# Altium PCB usomiq-bone-cape.PcbDoc (part 1 of 2)
Units mm, origin at the board's own origin, x right, y up, seen from the top; angles counter-clockwise.
Board outline 86.36 x 54.61 mm, 2 copper layers (Top Layer, Bottom Layer); 65 components, 133 nets, 450 pads, 169 vias.
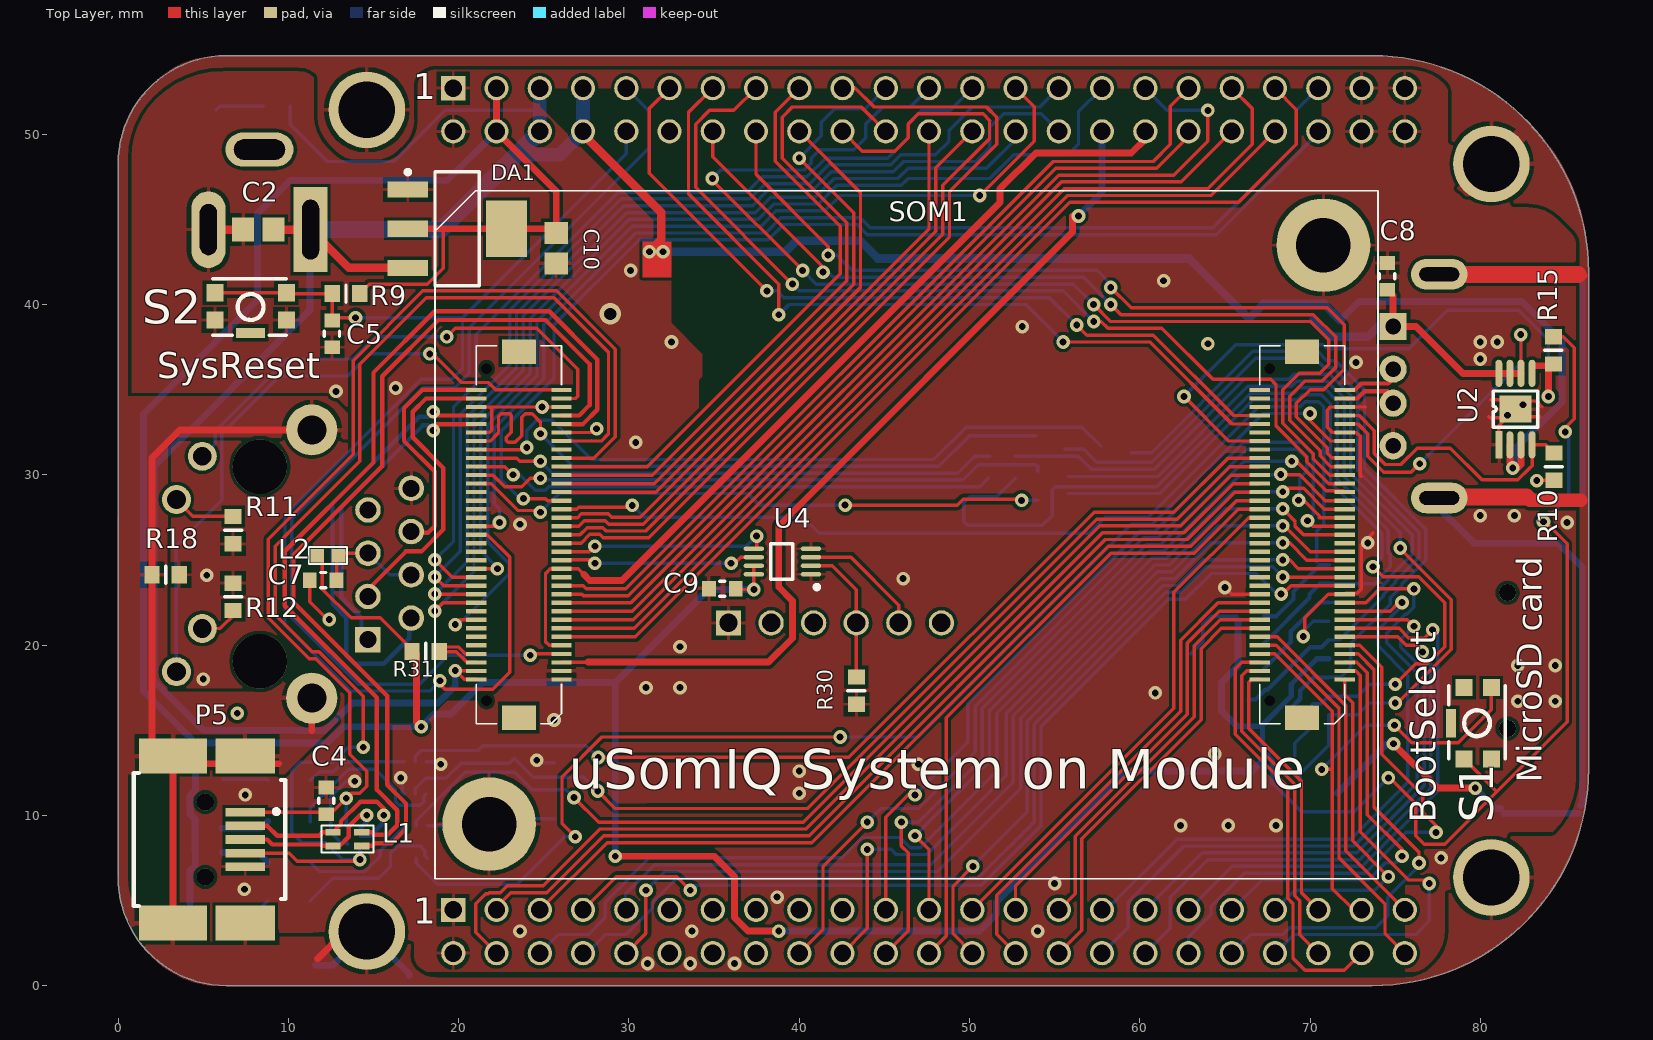
[diagram p0: Top Layer view]
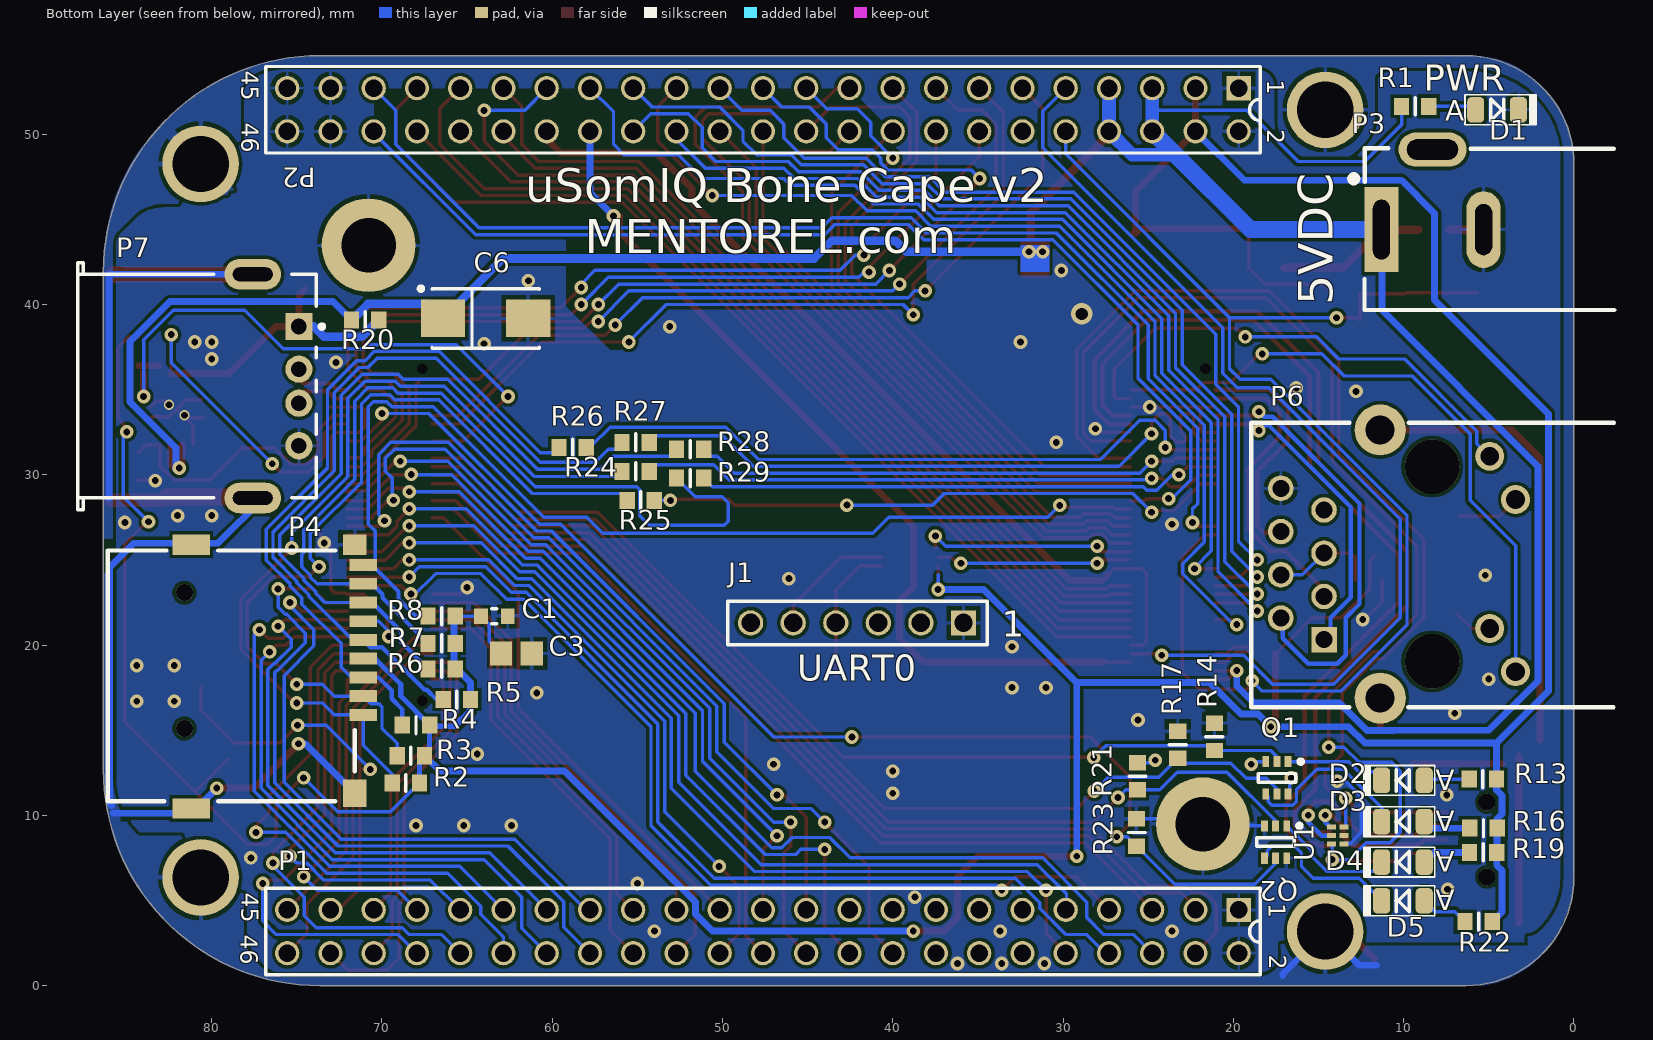
[diagram p1: Bottom Layer view, seen from below]

## Layer stack, top to bottom
Top Layer: signal copper 0.0356
Dielectric: dielectric 0.32, FR-4, Dk 4.8
Bottom Layer: signal copper 0.0356

## Board outline
0,6.35 0,48.26 cw(c6.35,48.26) 6.35,54.61 73.66,54.61 cw(c73.66,41.91) 86.36,41.91 86.36,12.7 cw(c73.66,12.7) 73.66,0 6.35,0 cw(c6.35,6.35)

## Design rules (kind name [scope] priority, off if disabled: settings)
AssemblyTestPointUsage [All] p1 off:
AssemblyTestPointUsage AssemblyTestPointUsage_1 [All] p2 off:
AssemblyTestpoint [All] p1 off: testpointundercomponent=TRUE minsize=1.016 maxsize=2.54 preferedsize=1.524 minholesize=0 maxholesize=1.016 preferedholesize=0.813 testpointgrid=0.025 usegrid=TRUE gridtolerance=0 allowsidetop=TRUE allowsidebottom=TRUE
AssemblyTestpoint AssemblyTestpoint_1 [All] p2 off: testpointundercomponent=TRUE minsize=1.016 maxsize=2.54 preferedsize=1.524 minholesize=0 maxholesize=1.016 preferedholesize=0.813 testpointgrid=0.025 usegrid=TRUE gridtolerance=0 allowsidetop=TRUE allowsidebottom=TRUE
Clearance [All] p1: gap=0.2
ComponentClearance [All] p1 off: gap=0.254 collisioncheckmode=3 verticalgap=0.254 showdistances=FALSE
ComponentClearance ComponentClearance_1 [All] p2 off: gap=0.254 collisioncheckmode=3 verticalgap=0.254 showdistances=FALSE
DiffPairsRouting [InNetClass('DIFF')] p1: maxlimit=0.254 minlimit=0.254 mostfreqgap=0.254 maxuncoupledlength=12.7
FabricationTestPointUsage [All] p1 off: valid=0 allowmultiple=FALSE
FabricationTestPointUsage FabricationTestPointUsage_1 [All] p2 off: valid=0 allowmultiple=FALSE
FabricationTestpoint [All] p1 off: side=3 testpointundercomponent=TRUE minsize=1.016 maxsize=2.54 preferedsize=1.524 minholesize=0 maxholesize=1.016 preferedholesize=0.813 testpointgrid=0.025 allowsidetop=TRUE allowsidebottom=TRUE usegrid=TRUE gridtolerance=0
FabricationTestpoint FabricationTestpoint_1 [All] p2 off: side=3 testpointundercomponent=TRUE minsize=1.016 maxsize=2.54 preferedsize=1.524 minholesize=0 maxholesize=1.016 preferedholesize=0.813 testpointgrid=0.025 allowsidetop=TRUE allowsidebottom=TRUE usegrid=TRUE gridtolerance=0
FanoutControl Fanout_LCC [IsLCC] p1: bgadir=Out bgaviamode=Centered fanoutstyle=Auto fanoutdirection=Alternating viagrid=0.025 // Fanout_LCC (Default Rule)
FanoutControl Fanout_BGA [IsBGA] p2: bgadir=Out bgaviamode=Centered fanoutstyle=Auto fanoutdirection=Alternating viagrid=0.025 // Fanout_BGA (Default Rule)
FanoutControl Fanout_Default [All] p4: bgadir=Out bgaviamode=Centered fanoutstyle=Auto fanoutdirection=Alternating viagrid=0.025 // Fanout_Default (Default Rule)
FanoutControl Fanout_Small [(CompPinCount < 5)] p5: bgadir=Out bgaviamode=Centered fanoutstyle=Auto fanoutdirection=OutThenIn viagrid=0.025 // Fanout_Small (Default Rule)
FanoutControl Fanout_BGA_1 [IsBGA] p6: bgadir=Out bgaviamode=Centered fanoutstyle=Auto fanoutdirection=Alternating viagrid=0.025 // Fanout_BGA (Default Rule)
FanoutControl Fanout_LCC_1 [IsLCC] p7: bgadir=Out bgaviamode=Centered fanoutstyle=Auto fanoutdirection=Alternating viagrid=0.025 // Fanout_LCC (Default Rule)
FanoutControl Fanout_SOIC_1 [IsSOIC] p8: bgadir=Out bgaviamode=Centered fanoutstyle=Auto fanoutdirection=Alternating viagrid=0.025 // Fanout_SOIC (Default Rule)
FanoutControl Fanout_Small_1 [(CompPinCount < 5)] p9: bgadir=Out bgaviamode=Centered fanoutstyle=Auto fanoutdirection=OutThenIn viagrid=0.025 // Fanout_Small (Default Rule)
FanoutControl Fanout_Default_1 [All] p10: bgadir=Out bgaviamode=Centered fanoutstyle=Auto fanoutdirection=Alternating viagrid=0.025 // Fanout_Default (Default Rule)
Height [All] p1 off: minheight=0 maxheight=25.4 prefheight=12.7
Height Height_1 [All] p2 off: minheight=0 maxheight=25.4 prefheight=12.7
HoleSize [All] p1 off: absolutevalues=TRUE maxlimit=2.54 minlimit=0.025 maxpercent=80.000 minpercent=20.000
HoleSize HoleSize_1 [All] p2 off: absolutevalues=TRUE maxlimit=2.54 minlimit=0.025 maxpercent=80.000 minpercent=20.000
HoleToHoleClearance [All] p1 off: gap=0.254 allowstackedmicrovias=TRUE
HoleToHoleClearance HoleToHoleClearance_1 [All] p2 off: gap=0.254 allowstackedmicrovias=TRUE
LayerPairs [All] p1 off: enforce=TRUE
LayerPairs LayerPairs_1 [All] p2 off: enforce=TRUE
MinimumSolderMaskSliver [All] p1 off: minsoldermaskwidth=0.254
MinimumSolderMaskSliver MinimumSolderMaskSliver_1 [All] p2 off: minsoldermaskwidth=0.254
NetAntennae [All] p1 off: netantennaetolerance=0
NetAntennae NetAntennae_1 [All] p2 off: netantennaetolerance=0
PasteMaskExpansion PasteMaskExpansion_1 [All] p2: expansion=0
PlaneClearance [All] p1 off: clearance=0.508
PlaneConnect [All] p1: planeconnectstyle=Relief reliefexpansion=0.2 reliefentries=4 reliefconductorwidth=0.2 reliefairgap=0.2
PolygonConnect PolygonConnect_EARTH [All vs InNet(EARTH)] p1: connectstyle=Relief reliefconductorwidth=0.254 reliefentries=4 polygonreliefangle="90 Angle" airgapwidth=0.254
PolygonConnect PolygonConnect_Via [IsVia] p2: connectstyle=Direct reliefconductorwidth=0.254 reliefentries=4 polygonreliefangle="90 Angle" airgapwidth=0.254
PolygonConnect [All] p3: connectstyle=Relief reliefconductorwidth=0.2 reliefentries=4 polygonreliefangle="90 Angle" airgapwidth=0.254
RoutingPriority RoutingPriority_1 [All] p2: routingpriority=0
RoutingTopology RoutingTopology_1 [All] p2: topology=Shortest
RoutingVias [All] p1: holewidth=0.4 width=0.8 viastyle="Through Hole" minholewidth=0.4 minwidth=0.8 maxholewidth=0.4 maxwidth=0.8
SilkToSilkClearance [All] p1 off: silktosilkclearance=0.254
SilkToSilkClearance SilkToSilkClearance_1 [All] p2 off: silktosilkclearance=0.254
SilkscreenOverComponentPads [All] p1 off: minsilkscreentomaskgap=0.254
SilkscreenOverComponentPads SilkscreenOverComponentPads_1 [All] p2 off: minsilkscreentomaskgap=0.254
SolderMaskExpansion [All] p1: expansion=0.102
SolderMaskExpansion SolderMaskExpansion_1 [All] p2: expansion=0.102
UnRoutedNet UnRoutedNet_1 [All] p2:
Width Width_diff [InNetClass('DIFF')] p1: maxlimit=0.254 minlimit=0.254 preferedwidth=0.254
Width [All] p2: maxlimit=1 minlimit=0.2 preferedwidth=0.2
8 further rules are at their usual default settings.

## Classes and differential pairs
component class bone_capes: P1 P2
component class usomiq: SOM1
differential pair ETH_RX: +ETH_RX_P -ETH_RX_N
differential pair ETH_TX: +ETH_TX_P -ETH_TX_N
differential pair USB0_D: +USB0_D_P -USB0_D_N
differential pair USB0: +USB0_P -USB0_N
differential pair USB1: +USB1_P -USB1_N

## Components (designator, comment, footprint, x,y, rotation, side; value= is the part's Value field where it differs from the comment)
C1 "C0603" CC1608-0603 63.4,21.7 r180 bottom
C2 "C0805" CC2012-0805 8.23,44.399 r0 top
C3 "C0805" CC2012-0805 62.1,19.5 r0 bottom
C4 "C0603" CC1608-0603 12.219,10.855 r90 top locked
C5 "C0603" CC1608-0603 12.573,38.278 r270 top
C6 "Cap_C" Cap_C 63.914,39.182 r180 bottom locked
C7 "C0603" CC1608-0603 12.044,23.805 r180 top locked
C8 "C0603" CC1608-0603 74.539,41.657 r270 top locked
C9 "C0603" CC1608-0603 35.484,23.317 r0 top
C10 "C0805" CC2012-0805 25.73,43.307 r90 top
D1 "LED0805" LED0805 5.766,51.435 r180 bottom
D2 "LED0805" LED0805 8.789,12.057 r0 bottom locked
D3 "LED0805" LED0805 8.789,9.632 r0 bottom locked
D4 "LED0805" LED0805 8.789,7.257 r0 bottom locked
D5 "LED0805" LED0805 8.789,4.982 r0 bottom locked
DA1 "LM1117" SOT230P700X160-4N 19.914,44.45 r0 top
J1 "HEADER 6" DIP6 35.85,21.3 r270 bottom locked
L1 "DLW21H" DLW21H 13.469,8.605 r0 top locked
L2 "BLM18A-FB" CHIP0603 11.694,25.255 r0 top locked
P1 "HDR_46_F_2_0.1_0.1" DIP46 19.685,4.445 r270 bottom locked
P2 "HDR_46_F_2_0.1_0.1" DIP46 19.685,52.705 r270 bottom locked
P3 "PJ-002A" PJ-002A 11.303,44.399 r90 bottom
P4 "" TFC08WP01F-A-R1K-H 71.1,15.9 r270 bottom locked
P5 "MiniUSB-B" "MINI-USB-B5 SMT" 1.219,13.081 r0 top
P6 "CONN_RJ45_MAG_WE_0" TRJ0011ABNL 14.675,20.315 r90 bottom locked
P7 "CONN_54819-0578_2" USB2.5-2H4C 87.869,35.205 r0 bottom locked
Q1 "RN1907" SOT363-6L 17.444,12.205 r270 bottom locked
Q2 "RN1907" SOT363-6L 17.519,8.43 r270 bottom locked
R1 "R0603" RESC1608X55N 9.322,51.638 r0 bottom
R2 "R0603" RESC1608X55N 68.6,11.9 r180 bottom
R3 "R0603" RESC1608X55N 68.3,13.5 r180 bottom
R4 "R0603" RESC1608X55N 68,15.3 r180 bottom
R5 "R0603" RESC1608X55N 65.6,16.8 r180 bottom
R6 "R0603" RESC1608X55N 66.5,18.6 r180 bottom
R7 "R0603" RESC1608X55N 66.5,20.1 r180 bottom
R8 "R0603" RESC1608X55N 66.5,21.7 r180 bottom
R9 "R0603" RESC1608X55N 13.386,40.64 r0 top
R10 "R0603" RESC1608X55N 84.314,30.482 r90 top locked
R11 "R0603" RESC1608X55N 6.756,26.746 r90 top
R12 "R0603" RESC1608X55N 6.756,22.835 r270 top
R13 "R0603" RESC1608X55N 5.344,12.13 r180 bottom locked
R14 "R0603" RESC1608X55N 21.114,14.607 r270 bottom locked
R15 "R0603" RESC1608X55N 84.289,37.307 r90 top locked
R16 "R0603" RESC1608X55N 5.309,9.246 r180 bottom
R17 "R0603" RESC1608X55N 23.266,14.148 r270 bottom
R18 "R0603" RESC1608X55N 2.794,24.13 r180 top locked
R19 "R0603" RESC1608X55N 5.334,7.823 r180 bottom
R20 "R0603" RESC1608X55N 70.989,39.082 r0 bottom
R21 "R0603" RESC1608X55N 25.629,12.294 r270 bottom
R22 "R0603" RESC1608X55N 5.594,3.755 r180 bottom
R23 "R0603" RESC1608X55N 25.679,8.992 r270 bottom
R24 "R0603" RESC1608X55N 55.1,30.2 r180 bottom
R25 "R0603" RESC1608X55N 54.8,28.5 r180 bottom
R26 "R0603" RESC1608X55N 58.8,31.6 r180 bottom
R27 "R0603" RESC1608X55N 55.1,31.9 r180 bottom
R28 "R0603" RESC1608X55N 51.9,31.5 r180 bottom
R29 "R0603" RESC1608X55N 51.9,29.8 r180 bottom
R30 "R0603" RESC1608X55N 43.358,17.323 r270 top
R31 "R0603" RESC1608X55N 18.059,19.609 r0 top
S1 "SW_KT11P2JM_2" KMR231GLFS 79.045,13.31 r90 top
S2 "SW_KT11P2JM_2" KMR231GLFS 9.881,39.091 r180 top
SOM1 "som-am335x" am3359_module-sockets 21.789,9.482 r0 top locked
U1 "TPD4S012" s-puson-n6 14.239,9.307 r180 bottom locked
U2 "TPS2051B" R-PDSO-G8 81.089,31.757 r90 top
U4 "IC_SN74LVC2G241_1" SOP127P600-8N 39.014,24.907 r180 top locked

## Footprints (in the part's own frame and the unit in brackets; to place one, negate y for a bottom-side part, rotate by r counter-clockwise, add the part's x,y. Pads: shape width x height; smd on the part's side, far side on the other; paste and mask are expansions set on the pad)
am3359_module-sockets [mm]
  rect 1.2x0.25 smd paste+0 mask+0.02: A1(4.25,8.5) A2(-0.75,8.5) A3(4.25,9) A4(-0.75,9) A5(4.25,9.5) A6(-0.75,9.5) A7(4.25,10) A8(-0.75,10) A9(4.25,10.5) A10(-0.75,10.5) A11(4.25,11) A12(-0.75,11) A13(4.25,11.5) A14(-0.75,11.5) A15(4.25,12) A16(-0.75,12) A17(4.25,12.5) A18(-0.75,12.5) A19(4.25,13) A20(-0.75,13) A21(4.25,13.5) A22(-0.75,13.5) A23(4.25,14) A24(-0.75,14) A25(4.25,14.5) A26(-0.75,14.5) A27(4.25,15) A28(-0.75,15) A29(4.25,15.5) A30(-0.75,15.5) A31(4.25,16) A32(-0.75,16) A33(4.25,16.5) A34(-0.75,16.5) A35(4.25,17) A36(-0.75,17) A37(4.25,17.5) A38(-0.75,17.5) A39(4.25,18) A40(-0.75,18) A41(4.25,18.5) A42(-0.75,18.5) A43(4.25,19) A44(-0.75,19) A45(4.25,19.5) A46(-0.75,19.5) A47(4.25,20) A48(-0.75,20) A49(4.25,20.5) A50(-0.75,20.5) A51(4.25,21) A52(-0.75,21) A53(4.25,21.5) A54(-0.75,21.5) A55(4.25,22) A56(-0.75,22) A57(4.25,22.5) A58(-0.75,22.5) A59(4.25,23) A60(-0.75,23) A61(4.25,23.5) A62(-0.75,23.5) A63(4.25,24) A64(-0.75,24) A65(4.25,24.5) A66(-0.75,24.5) A67(4.25,25) A68(-0.75,25) A69(4.25,25.5) A70(-0.75,25.5) B1(50.25,8.5) B2(45.25,8.5) B3(50.25,9) B4(45.25,9) B5(50.25,9.5) B6(45.25,9.5) B7(50.25,10) B8(45.25,10) B9(50.25,10.5) B10(45.25,10.5) B11(50.25,11) B12(45.25,11) B13(50.25,11.5) B14(45.25,11.5) B15(50.25,12) B16(45.25,12) B17(50.25,12.5) B18(45.25,12.5) B19(50.25,13) B20(45.25,13) B21(50.25,13.5) B22(45.25,13.5) B23(50.25,14) B24(45.25,14) B25(50.25,14.5) B26(45.25,14.5) B27(50.25,15) B28(45.25,15) B29(50.25,15.5) B30(45.25,15.5) B31(50.25,16) B32(45.25,16) B33(50.25,16.5) B34(45.25,16.5) B35(50.25,17) B36(45.25,17) B37(50.25,17.5) B38(45.25,17.5) B39(50.25,18) B40(45.25,18) B41(50.25,18.5) B42(45.25,18.5) B43(50.25,19) B44(45.25,19) B45(50.25,19.5) B46(45.25,19.5) B47(50.25,20) B48(45.25,20) B49(50.25,20.5) B50(45.25,20.5) B51(50.25,21) B52(45.25,21) B53(50.25,21.5) B54(45.25,21.5) B55(50.25,22) B56(45.25,22) B57(50.25,22.5) B58(45.25,22.5) B59(50.25,23) B60(45.25,23) B61(50.25,23.5) B62(45.25,23.5) B63(50.25,24) B64(45.25,24) B65(50.25,24.5) B66(45.25,24.5) B67(50.25,25) B68(45.25,25) B69(50.25,25.5) B70(45.25,25.5)
  round 5.5 hole 3.2 mask+0.05: GND(0,0) GND(49,34)
  rect 2x1.45 smd mask+0.02: GND(1.75,6.25) GND(1.75,27.75) GND(47.75,6.25) GND(47.75,27.75)
  rect 0x0.25 hole 0.625 mask+0.02: NC(-0.15,7.25) NC(-0.15,26.75) NC(45.85,7.25) NC(45.85,26.75)
  silkscreen extent -3.17,-3.2 52.2,37.2, body extent -1.12,5.89 50.58,28.13, height 3.5
Cap_C [mm] "Capacitor, SM Tantalum; Body 6.0 x 3.2 mm (LxW typ)"
  rect 2.6x2.2 smd: 1(-2.5,0) 2(2.5,0)
  silkscreen extent -3.93,-1.75 3.15,1.87, body extent -3.15,-1.75 3.15,1.75, height 2.8
CC1608-0603 [mil] "Chip Capacitor, 2-Leads, Body 1,6x0,8mm, IPC Medium Density"
  rect 32x36 smd: 1(-31,0) 2(31,0)
  silkscreen extent -6,-18 6,17, body extent -31,-16 31,16, height 31
CC2012-0805 [mm] "Chip Capacitor, 2-Leads, Body 2,0x1,25mm, IPC Medium Density"
  rect 1.3x1.4 smd: 1(-0.9,0) 2(0.9,0)
  body extent -1,-0.6 1,0.6, height 1.2
CHIP0603 [mm]
  rect 0.8x0.8 smd: 1(0,0) 2(1.25,0)
  silkscreen extent -0.5,-0.5 1.75,0.5, body extent -0.53,-0.5 1.75,0.51, height 0.95
DIP6 [mm]
  rect 1.48x1.48 hole 1.08: 1(0,0)
  round 1.48 hole 1.08: 2(0,-2.5) 3(0,-5) 4(0,-7.5) 5(0,-10) 6(0,-12.5)
  silkscreen extent -1.27,-13.84 1.27,1.4, body extent -1.15,-13.72 1.12,1.28, height 8
DIP46 [mm]
  rect 1.42x1.42 hole 1.02: 1(0,0)
  round 1.42 hole 1.02: 2(2.54,0) 3(0,-2.54) 4(2.54,-2.54) 5(0,-5.08) 6(2.54,-5.08) 7(0,-7.62) 8(2.54,-7.62) 9(0,-10.16) 10(2.54,-10.16) 11(0,-12.7) 12(2.54,-12.7) 13(0,-15.24) 14(2.54,-15.24) 15(0,-17.78) 16(2.54,-17.78) 17(0,-20.32) 18(2.54,-20.32) 19(0,-22.86) 20(2.54,-22.86) 21(0,-25.4) 22(2.54,-25.4) 23(0,-27.94) 24(2.54,-27.94) 25(0,-30.48) 26(2.54,-30.48) 27(0,-33.02) 28(2.54,-33.02) 29(0,-35.56) 30(2.54,-35.56) 31(0,-38.1) 32(2.54,-38.1) 33(0,-40.64) 34(2.54,-40.64) 35(0,-43.18) 36(2.54,-43.18) 37(0,-45.72) 38(2.54,-45.72) 39(0,-48.26) 40(2.54,-48.26) 41(0,-50.8) 42(2.54,-50.8) 43(0,-53.34) 44(2.54,-53.34) 45(0,-55.88) 46(2.54,-55.88)
  silkscreen extent -1.27,-57.15 3.81,1.27, body extent -1.27,-57.15 3.81,1.27, height 8.51
DLW21H [mm] "DLW21H Series Murata"
  rect 0.9x0.4 smd mask+0.05: 1(-0.85,-0.4) 2(0.85,-0.4) 3(0.85,0.4) 4(-0.85,0.4)
  silkscreen extent -1.52,-0.8 1.52,0.8, body extent -1,-0.6 1,0.6, height 1.2
KMR231GLFS [mm] "Tactile Switches"
  rect 1x1 smd: 1(0,0) 2(0,-1.6) 3(4.2,0) 4(4.2,-1.6)
  rect 1.7x0.6 smd: 5(2.1,0.762)
  silkscreen extent 0,-2.41 4.32,0.89, body extent 0.13,-2.29 4.06,0.76, height 1.5
LED0805 [mm]
  rrect50% 1x1.5 smd: 1(0,0) 2(2.5,0)
  silkscreen extent -0.63,-0.87 3.55,0.87, body extent -0.64,-0.89 3.17,0.89, height 1.1
"MINI-USB-B5 SMT" [mm]
  rect 2.3x0.5 smd: 1(6.25,-2.9) 2(6.25,-3.7) 3(6.25,-4.5) 4(6.25,-5.3) 5(6.25,-6.1)
  rect 4x2.05 smd: 6(2,-9.4) 9(2,0.4)
  rect 3.5x2.05 smd: 7(6.25,-9.4) 8(6.25,0.4)
  round 1 hole 1 unplated: SYSPAD10(3.9,-6.7) SYSPAD11(3.9,-2.3)
  silkscreen extent -0.3,-8.4 8.6,-0.6, body extent -1.84,-9.79 7.36,0.91, height 3.95
PJ-002A [mm] "DC POWER JACK"
  rect 5x2 hole 1 slot 3.5 at 0 deg: 1(0,0)
  oval 4.5x2 hole 1 slot 3 at 0 deg: 2(0,-6)
  oval 2x4 hole 1.2 slot 3 at 90 deg: 3(4.7,-3)
  silkscreen extent -4.72,-13.67 4.77,1.81, body extent -4.37,-13.59 4.93,0.41, height 11
R-PDSO-G8 [mm]
  rect 1.6x0.4 smd: 1(0,0)
  oval 1.6x0.4 smd: 2(0,-0.65) 3(0,-1.3) 4(0,-1.95) 5(4.2,-1.95) 6(4.2,-1.3) 7(4.2,-0.65) 8(4.2,0)
  rect 1.57x1.89 smd: 9(2.1,-0.975)
  silkscreen extent 1.03,-2.28 3.17,0.33, body extent 0.45,-2.75 3.73,0.8, height 1.1
RESC1608X55N [mm] "Chip Resistor, EIA 0603, Metric 1608, Body 1.6x0.8mm, IPC Medium Density"
  rect 0.9x1 smd: 1(-0.8,0) 2(0.8,0)
  silkscreen extent 0,-0.5 0,0.5, body extent -0.87,-0.47 0.88,0.48, height 0.55
s-puson-n6 [mm]
  rect 0.52x0.3 smd mask+0.05: 1(0,0) 2(0,-0.5) 3(0,-1) 4(0.74,-1) 5(0.74,-0.5) 6(0.74,0)
  body extent -0.25,-1.14 1.02,0.13, height 0.6
SOP127P600-8N [mm]
  oval 1.2x0.25 smd mask+0.05: 1(-1.675,0.75) 2(-1.675,0.25) 3(-1.675,-0.25) 4(-1.675,-0.75) 5(1.675,-0.75) 6(1.675,-0.25) 7(1.675,0.25) 8(1.675,0.75)
  silkscreen extent -2.15,-1.05 0.67,1.62, body extent -1.55,-1.05 1.55,1.05, height 0.9
SOT230P700X160-4N [mm] "SOT223, 4-Leads, Body 6,7x7,3mm (max), Pitch 2,30mm, IPC Medium Density"
  rect 2.4x0.95 smd: 1(-2.9,2.3) 2(-2.9,0) 3(-2.9,-2.3)
  rect 2.4x3.3 smd: 4(2.9,0)
  silkscreen extent -3.02,-3.35 1.3,3.45, body extent -3.48,-3.35 3.48,3.35, height 1.7
SOT363-6L [mm] "SOT363, 6-Leads, Body 2x1.3mm, Pitch 0.65mm, Lead Span 2.1mm, IPC High Density"
  rect 0.65x0.4 smd: 1(-0.95,0.65) 2(-0.95,0) 3(-0.95,-0.65) 4(0.95,-0.65) 5(0.95,0) 6(0.95,0.65)
  silkscreen extent -1.07,-1.1 0.25,1.52, body extent -1.15,-1.1 1.15,1.1, height 1
TFC08WP01F-A-R1K-H [mm]
  rect 0.7x1.6 smd paste+0 mask+0.064: 1(0,0) 2(-1.1,0) 3(-2.2,0) 4(-3.3,0) 5(-4.4,0) 6(-5.5,0) 7(-6.6,0) 8(-7.7,0) 9(-8.8,0)
  rect 1.2x1.4 smd paste+0 mask+0.064: 10(-10,-0.5)
  rect 1.2x2.2 smd paste+0 mask+0.064: 11(-10,-10.1) 12(5.5,-10.1)
  rect 1.6x1.4 smd paste+0 mask+0.064: 13(4.6,-0.5)
  round 1 hole 1 unplated: free(-7.18,-10.5) free(0.8,-10.5)
  silkscreen extent -9.65,-15 5.08,-0.51, body extent -9.65,-14.99 5.08,-0.51, height 1.8
TRJ0011ABNL [mm] "TRJ0011ABNL RJ-45 magnet"
  round 3.2 hole 3.2 unplated: 0(-1.27,-6.35) 0(10.16,-6.35)
  rect 1.5x1.5 hole 1: 1(0,0)
  round 1.5 hole 1: 2(1.27,2.54) 3(2.54,0) 4(3.81,2.54) 5(5.08,0) 6(6.35,2.54) 7(7.62,0) 8(8.89,2.54)
  round 1.7 hole 1.1: 9(-1.88,-11.25) 10(0.66,-9.73) 11(8.23,-11.25) 12(10.77,-9.73)
  round 3 hole 1.7: 13(-3.43,-3.3) 14(12.32,-3.3)
  silkscreen extent -3.98,-17.02 12.75,4.28, body extent -3.7,-17.1 12.5,4.06, height 13.4
USB2.5-2H4C [mm] "Connector; USB1.1, Type A, Thru-Hole; 4 Position; Right Angle"
  rect 1.6x1.6 hole 0.92: 1(-12.99,-3.5)
  round 1.6 hole 0.92: 2(-12.99,-1) 3(-12.99,1) 4(-12.99,3.5)
  oval 3.34x1.8 hole 0.8 slot 2.34 at 0 deg: 5(-10.28,6.57) 6(-10.28,-6.57)
  silkscreen extent -14.46,-7.25 0,7.25, body extent -14,-7.9 0.13,7.9, height 7.55

## Part data
C6: "Tantalum Capacitor Case C"
D1 D2 D3 D4 D5: "LED 0805"
DA1: "800mA Low-Dropout Linear Regulator"
J1: "CONN HEADER 6POS, VERTICAL,  .100 STR TIN"
L1: "Low profile wire-wound common choke coil"
L2: "Chip EMIFILr Inductor Type"
P1 P2: "NN HEADER FMAL 46PS.1\" DL GOLD"
P3: "DC POWER JACK"
P4: library part TFC08WP01F-R1K-H-CN, "Connector for microSD™ Card (Push-push Type)"
P5: "Mini USB Type B CONNECTOR"
P6: "RJ-45 10/100 W/Magnetics"
P7: "USB Type A Connectors"
Q1 Q2: "Transistor Silicon NPN"
S1 S2: "SMD button"
U1: "4-Channel USB ESD Solution with Power Clamp"
U2: "CURRENT-LIMITED, POWER-DISTRIBUTION SWITCHES"
U4: "Dual Buffer/Driver With 3-State Outputs"

## Free pads (board coordinates)
  round 4.5 hole 3.3: free(14.605,3.175) free(14.605,51.435) free(80.645,6.35) free(80.645,48.26)

## Via types
v1: diameter 0.8, hole 0.4, Top Layer to Bottom Layer, 166 vias
v2: diameter 0.6, hole 0.4, Top Layer to Bottom Layer, 2 vias
v3: diameter 1.27, hole 0.711, Top Layer to Bottom Layer, 1 vias

## Nets (pads, with @x,y where several pads share a name; then routed paths per layer and width w, separated by ;. In a path a pad name is that pad's centre, name@x,y a point inside that pad or via, vN(x,y) a via of type N, cw(c..) or ccw(c..) an arc to the next point about the centre after c; other vN are vias at no path point)
3V3_OUT: R31.2 SOM1.A6 SOM1.A8 | length 4.9
  Top Layer w0.2: SOM1.A6@21.039,18.982 20.49,18.982 19.863,19.609 R31.2@18.859,19.609 19.139,19.888 19.984,19.888 20.39,19.482 SOM1.A8@21.039,19.482
5VDC: C2.2 C6.1 DA1.3 P2.5 P2.6 P2.7 P2.8 P3.1 R1.2 R20.2 SOM1.A2 SOM1.A4 U2.2 U2.3 | length 184.4
  Top Layer w0.2: v1(19.8,18.5) v1@19.818,18.482 ; SOM1.A2@21.039,17.982 20.318,17.982 v1@19.818,18.482 ; SOM1.A4@21.039,18.482 v1@19.818,18.482
  Top Layer w0.4: U2.2@81.739,31.757 81.739,30.661 82.1,30.3 82.389,30.589 U2.3@82.389,31.757
  Top Layer w0.5: C2.2@9.13,44.399 P3.1@11.303,44.399 13.552,42.15 DA1.3@17.014,42.15
  Top Layer w0.508: P2.8@27.305,50.165 27.305,49.995 31.9,45.4 31.9,43.8 v1(31.2,43.1)
  Bottom Layer w0.2: R1.2@10.122,51.638 10.122,50.572 12.294,48.4 16.2,48.4 19.2,51.4 24.765,51.4
  Bottom Layer w0.4: P3.1@11.303,44.399 11.269,44.365 11.269,39.669 2.1,30.5 2.1,17.9 5,15 10.573,15 10.588,14.985 12.162,14.985 13.777,16.6 18.8,16.6 19.8,17.6 v1(19.8,18.5) ; R20.2@71.789,39.082 72.877,40.17 82.457,40.17 84.8,37.827 84.8,34.269 82.1,31.569 82.1,30.3 82,30.4 v1(81.9,30.4)
  Bottom Layer w0.508: v1(32,43.1) 39.2,43.1 39.854,43.754 43.57,43.754 44.624,42.7 62.896,42.7 C6.1@66.414,39.182 67.268,40.036 70.827,40.036 71.781,39.082 R20.2@71.789,39.082
  Bottom Layer w0.8: 23.393,48.793 25.933,48.793 P2.8@27.305,50.165 P2.7@27.305,52.705 ; P2.6@24.765,50.165 24.765,51.4 P2.5@24.765,52.705
  Bottom Layer w1: P3.1@11.303,44.399 18.999,44.399 23.393,48.793 P2.6@24.765,50.165
AIN0: P2.39 SOM1.A11 | length 59
  Top Layer w0.2: SOM1.A11@26.039,20.482 30.383,20.482 55.901,46 65.8,46 69.2,49.4 69.2,51.45 P2.39@67.945,52.705
AIN1: P2.40 SOM1.A13 | length 54
  Top Layer w0.2: SOM1.A13@26.039,20.982 30.318,20.982 55.736,46.4 64.18,46.4 P2.40@67.945,50.165
AIN2: P2.37 SOM1.A15 | length 55.9
  Top Layer w0.2: SOM1.A15@26.039,21.482 30.252,21.482 55.57,46.8 64,46.8 66.6,49.4 66.6,51.51 P2.37@65.405,52.705
AIN3: P2.38 SOM1.A17 | length 51
  Top Layer w0.2: SOM1.A17@26.039,21.982 30.186,21.982 55.404,47.2 62.44,47.2 P2.38@65.405,50.165
AIN4: P2.33 SOM1.A19 | length 55.2
  Top Layer w0.2: SOM1.A19@26.039,22.482 30.12,22.482 55.238,47.6 62,47.6 64,49.6 v1(64,51.4)
  Bottom Layer w0.2: P2.33@60.31,52.69 61.6,51.4 v1(64,51.4)
AIN5: P2.36 SOM1.A21 | length 47.9
  Top Layer w0.2: SOM1.A21@26.039,22.982 27.245,22.982 27.327,22.9 29.973,22.9 55.073,48 61,48 P2.36@62.8,49.8
AIN6: P2.35 SOM1.A23 | length 51.8
  Top Layer w0.2: SOM1.A23@26.039,23.482 27.311,23.482 27.493,23.3 29.807,23.3 54.907,48.4 59.2,48.4 ; 60.6,48.4 59.2,48.4 ; P2.35@62.865,52.705 61.8,51.64 61.8,49.4 60.8,48.4 59.2,48.4
B_UART0_RX: J1.4 R30.1 U4.2 | length 8.4
  Top Layer w0.2: U4.2@40.689,24.657 41.943,24.657 43.35,23.25 J1.4@43.35,21.3 43.358,21.292 R30.1@43.358,18.123
B_UART0_TX: J1.5 U4.3 | length 7.4
  Top Layer w0.2: U4.3@40.689,25.157 43.043,25.157 45.85,22.35 J1.5@45.85,21.3
CLKOUT2: P2.41 SOM1.A38 | length 67.3
  Top Layer w0.2: SOM1.A38@21.039,26.982 22.082,26.982 v1@22.4,27.3
  Bottom Layer w0.2: v1(22.4,27.2) 22.4,28 22.1,28.3 22.1,32.738 25,35.638 25,38.8 30.4,44.2 38.027,44.2 38.927,45.1 43.573,45.1 44.173,44.5 64.3,44.5 69.2,49.4 69.2,51.42 P2.41@70.485,52.705
DGND: C1.2 C2.1 C3.1 C4.2 C5.2 C6.2 C7.2 C8.1 C9.1 C10.1 D1.2 DA1.1 J1.1 P1.1 P1.2 P2.1 P2.2 P2.43 P2.44 P2.45 P2.46 P3.2 P4.6 P4.10 P5.5 P6.8 P7.4 Q1.3 Q1.6 Q2.3 Q2.6 R10.1 R11.1 R12.1 R14.1 R17.1 R18.1 R21.1 R23.1 R30.2 S2.1 S2.3 SOM1.A1 SOM1.A3 SOM1.A42 SOM1.A59 SOM1.A60 SOM1.A65 SOM1.A66 SOM1.B21 SOM1.B22 SOM1.B59 SOM1.B65 SOM1.GND@21.789,9.482 SOM1.GND@70.789,43.482 U1.4 U2.1 U2.9 U4.1 U4.4 | length 60.5
  Top Layer w0.2: C7.2@11.257,23.805 11.257,22.543 v1@12.35,21.45 ; SOM1.A60@21.039,32.482 21.8,32.482 21.939,32.621 21.939,33.843 21.8,33.982 ; SOM1.A66@21.039,33.982 21.8,33.982 ; SOM1.A59@26.039,32.482 27.882,32.482 v1(28.1,32.7) ; SOM1.A65@26.039,33.982 v1(24.9,33.982) 21.8,33.982 ; v1@65,23.4 v1(65,23.382) 65.4,22.982 SOM1.B22@67.039,22.982 ; v1(69.6,20.5) 69.7,20.6 69.7,21.6 71.082,22.982 SOM1.B21@72.039,22.982 72.114,23.057 72.763,23.057 73,23.294 73,25.9 73.7,26.6 ; 73,29.9 72.939,29.961 72.939,32.261 72.718,32.482 SOM1.B59@72.039,32.482 71.318,32.482 71,32.8 71,33.8 71.182,33.982 73.26,33.982 ; 80.5,33.4 80.543,33.357 81.457,33.357 v2(81.6,33.5) ; 80.6,34.4 81.521,34.4 U2.9@82.064,33.857 ; U2.1@81.089,31.757 81.089,32.882 U2.9@82.064,33.857 ; v2(82.5,34.118) 82.714,34.332 83.268,34.332 83.6,34 ; v1(83.31,29.66) 83.332,29.682 R10.1@84.314,29.682 ; 83.5,33.4 82.521,33.4 U2.9@82.064,33.857
  Top Layer w0.5: P3.2@5.303,44.399 C2.1@7.33,44.399
  Bottom Layer w0.2: U1.4@13.499,8.307 13.449,8.357 13.115,8.357 12.939,8.533 12.939,8.561 12.5,9 12.5,11.1 13.4,12 v1(13.9,12) ; v1(16.6,12.2) 16.7,12.1 16.7,11.349 Q1.6@16.794,11.255 ; Q1.3@18.094,13.155 18.798,13.155 v1(18.948,13.005) ; Q2.3@18.169,9.38 21.687,9.38 SOM1.GND@21.789,9.482 22.099,9.792 R23.1@25.679,9.792 ; v1(24.587,13.233) 24.727,13.094 R21.1@25.629,13.094 ; v1(69.6,20.5) 69.6,20.8 70.2,21.4 P4.6@71.1,21.4
  other v1: 31.1,1.3 33.6,1.3 36.2,1.3 23.6,3.2 33.7,3.2 54,3.2 38.7,5.2 7.417,5.664 55,6 77.7,7.5 62.4,9.4 65.2,9.4 68,9.4 7.468,11.201 40,11.3 40,12.6 47,13 64.4,13.6 25.6,15.6 7,16 82.2,16.7 84.4,16.7 60.906,17.189 31,17.5 33,17.5 5,18 82.2,18.8 84.4,18.8 33,19.9 12.4,21.5 46.1,23.9 5.207,24.105 73.394,26 23.6,27.1 85.1,27.2 80,27.6 82,27.6 30.4,31.9 12.8,34.9 16.3,35.1 72.7,36.6 80,36.8 64,37.7 32.5,37.8 80,37.8 81,37.8 53.1,38.7 61.4,41.4 30.1,42
  other v3: 28.905,39.446
EARTH: P4.11 P4.12 P4.13 P5.6 P5.7 P5.8 P5.9 P6.13 P6.14 P7.5 P7.6 pad.free R18.2 | length 137.9
  Top Layer w0.4: P5.9@1.994,14.406 R18.2@1.994,24.13 1.994,30.994 3.635,32.635 P6.14@11.375,32.635 ; P5.6@3.219,3.681 P5.9@3.219,13.481 ; P5.9@4.194,13.03 9.43,13.03 ; 11.375,14.975 P6.13@11.375,16.885 ; 11.709,1.575 13.31,3.175 pad.free@14.605,3.175 pad.free@13.13,1.7 ; v1(74.9,14.2) 77.5,11.6 v1(79.7,11.6) ; P7.6@77.589,41.775 P7.6@77.589,42.411 ; 85.8,41.7 86.1,41.7
  Top Layer w0.8: 82.714,28.7 82.914,28.5 85.9,28.5
  Top Layer w1: P7.5@77.589,28.635 77.654,28.7 82.714,28.7 ; P7.6@77.589,41.775 85.725,41.775
  Bottom Layer w0.4: 11.6,1.2 12.63,1.2 pad.free@14.605,3.175 17.1,0.68 17.1,0.6 ; P4.13@71.6,11.3 74.5,14.2 v1(74.9,14.2) ; P7.5@76.965,28.635 79.618,25.982 P4.11@80.464,25.982 ; P7.6@77.589,41.775 86.02,41.775 86.02,28.635 ; v1(79.7,11.6) 80.9,10.4 P4.12@81.2,10.4 ; 79.808,25.982 P4.11@80.464,25.982 ; P4.12@81.4,10.1 85.77,10.12 ; 85.866,10.582 85.99,10.706 85.99,24.556 84.564,25.982 P4.11@80.464,25.982
EHRPWM1A: P2.14 SOM1.B51 | length 54.2
  Top Layer w0.2: P2.14@34.925,50.165 34.925,48.675 41.4,42.2 v1(41.4,41.9) ; v1(58.3,40) 58.9,39.4 70.2,39.4 71.5,38.1 71.5,36.3 70.71,35.51 69.71,35.51 68.8,34.6 68.8,33.2 70.6,31.4 70.6,31.109 71.227,30.482 SOM1.B51@72.039,30.482
  Bottom Layer w0.2: v1(41.4,41.9) 41.4,42.2 42,41.6 56.7,41.6 v1(58.3,40)
EHRPWM1B: P2.16 SOM1.B53 | length 52
  Top Layer w0.2: P2.16@37.465,50.165 37.465,47.635 41.7,43.4 v1(41.7,42.9) ; v1(58.3,41) 59.5,39.8 71,39.8 72,38.8 72,36.2 70.8,35 70,35 69.2,34.2 69.2,33.4 71,31.6 71,31.275 71.275,31 SOM1.B53@71.8,31
  Bottom Layer w0.2: v1(41.7,42.9) 42.2,42.9 43.1,42 57.5,42 v1@58.3,41.2 ; v1@58.1,41.2 v1(58.3,41)
EHRPWM2A: P1.19
EHRPWM2B: P1.13
ETH_ALINK: P6.9 SOM1.A69 | length 37.8
  Top Layer w0.2: v1@18.4,37.2 20.183,35.417 21.753,35.417 22.188,34.982 SOM1.A69@26.039,34.982
  Bottom Layer w0.2: P6.9@3.425,18.435 3.425,25.825 6.095,28.495 6.095,32.395 9.5,35.8 13.5,35.8 14.8,37.1 v1(18.3,37.1)
ETH_RX_N: P6.2 SOM1.A64 | length 25.7
  Top Layer w0.254: v1(18.5,33.7) 18.718,33.482 SOM1.A64@21.039,33.482
  Bottom Layer w0.254: P6.2@17.1,21.3 17.1,20.4 15.6,18.9 13.9,18.9 13.4,19.4 13.4,21.6 12.592,22.408 12.592,28.31 17.69,33.408 18.208,33.408 v1(18.5,33.7) v1@18.3,33.5
ETH_RX_P: P6.1 SOM1.A62 | length 18.4
  Top Layer w0.254: v1@18.5,32.8 18.674,32.974 SOM1.A62@21.039,32.974
  Bottom Layer w0.254: P6.1@14.3,20.6 14.3,21.6 13.1,22.8 13.1,28.1 17.9,32.9 18.2,32.9 v1(18.5,32.6) v1@18.334,32.766
ETH_SPEED100: P6.12 SOM1.A67 | length 29.2
  Top Layer w0.2: v1(19.3,38.1) 19.8,38.6 24.6,38.6 27,36.2 27,34.6 26.882,34.482 SOM1.A67@26.039,34.482
  Bottom Layer w0.2: P6.12@4.945,31.085 5.695,31.835 5.695,32.561 9.934,36.8 13.8,36.8 15.1,38.1 v1(19.3,38.1)
ETH_TX_N: P6.6 SOM1.A70 | length 13.5
  Top Layer w0.254: P6.6@17.6,26.6 18.2,26.6 18.592,26.992 18.592,30.19 16.792,31.99 16.792,33.91 17.872,34.99 SOM1.A70@21.039,34.99
ETH_TX_P: P6.3 SOM1.A68 | length 17.6
  Top Layer w0.254: P6.3@14.7,23.3 16.9,25.5 17.818,25.5 19.1,26.782 19.1,30.4 17.3,32.2 17.3,33.7 18.082,34.482 SOM1.A68@21.039,34.482
GNDA_ADC: P2.34 SOM1.A9 SOM1.A27 | length 52.3
  Top Layer w0.2: SOM1.A9@26.039,19.982 25.318,19.982 25.1,20.2 25.1,24.2 25.382,24.482 SOM1.A27@26.039,24.482 27.018,24.482 27.356,24.144
  Top Layer w0.4: 27.356,24.144 27.7,23.8 29.6,23.8 51.8,46 51.8,46.8 53.9,48.9 59.5,48.9 60.325,49.725 P2.34@60.325,50.165
GPIO0_7: P2.42 SOM1.A43 | length 64.5
  Top Layer w0.2: v1(23.8,28.6) 25.1,28.6 25.218,28.482 SOM1.A43@26.039,28.482
  Bottom Layer w0.2: v1(23.8,28.6) 23.61,28.6 22.5,29.71 22.5,30.29 22.5,32.572 25.6,35.672 25.6,38.8 30.6,43.8 38.193,43.8 39.093,44.7 43.407,44.7 44.007,44.1 64.5,44.1 P2.42@70.5,50.1
GPIO0_26: P1.14
GPIO0_27: P1.17
GPIO1_12: P1.12
GPIO1_13: P1.11
GPIO1_14: P1.16
GPIO1_15: P1.15
GPIO1_16: P2.15 SOM1.B47 | length 54.6
  Top Layer w0.2: P2.15@37.465,52.705 36.16,51.4 34.732,51.4 33.915,50.583 33.915,46.885 v1(39.6,41.2) ; 57.734,39 58.134,38.6 61.3,38.6 64.3,35.6 67.7,35.6 68,35.3 68,32.869 69.8,31.069 69.8,30.778 71.096,29.482 SOM1.B47@72.039,29.482
  Bottom Layer w0.2: v1(39.6,41.2) 40,40.8 55.5,40.8 v1(57.3,39)
GPIO1_17: P2.23 SOM1.B49 | length 67.5
  Top Layer w0.2: v1(34.9,47.4) 34.9,47.3 v1(40.2,42) ; v1(57.29,40) 57.3,40 58.3,39 70.034,39 71.1,37.934 71.1,36.5 70.573,35.973 69.373,35.973 68.4,35 68.4,33.034 70.2,31.234 70.2,30.944 71.162,29.982 SOM1.B49@72.039,29.982
  Bottom Layer w0.2: v1(34.9,47.4) 35.4,47.9 40.29,47.9 40.7,48.31 40.7,48.6 41.2,49.1 43.2,49.1 43.9,49.8 43.9,50.6 44.9,51.6 46.52,51.6 P2.23@47.625,52.705 ; v1(40.2,42) 41,41.2 56.09,41.2 v1(57.29,40)
GPIO1_28: P2.12
GPIO1_29: P1.26 SOM1.B27 | length 38.7
  Top Layer w0.2: P1.26@50.165,1.905 49.035,3.035 49.035,5.835 v1(50.2,7) ; v1(68.4,25) 68.8,25 69.318,24.482 SOM1.B27@72.039,24.482
  Bottom Layer w0.2: v1(50.2,7) 53.4,10.2 53.4,15.531 61.369,23.5 62.234,23.5 63.734,25 v1(68.4,25)
GPIO2_1: P1.18 SOM1.B39 | length 51.7
  Top Layer w0.2: P1.18@40.005,1.905 41.4,3.3 41.4,7 v1(44,9.6) ; v1@69.4,28.6 69.54,28.6 70.55,27.59 70.55,27.482 SOM1.B39@72.039,27.482
  Bottom Layer w0.2: v1(44,9.6) 44.8,10.4 46.99,10.4 50.327,13.737 50.327,16.418 60.209,26.3 61.075,26.3 66.275,31.5 69.262,31.5 69.8,30.962 69.8,30.21 69.4,29.81 v1@69.4,28.6
  other v1: 69.328,28.501
GPIO3_19: P2.27 SOM1.A16 | length 59.5
  Top Layer w0.2: v1(19.8,21.2) 20.082,21.482 SOM1.A16@21.039,21.482 ; v1(50.6,46.4) 53.8,49.6 53.8,51.61 P2.27@52.705,52.705
  Bottom Layer w0.2: v1(19.8,21.2) 19.98,21.2 22.976,24.196 22.976,24.776 21.7,26.051 21.7,32.903 24.6,35.803 24.6,39 30.2,44.6 37.762,44.6 38.662,45.5 41.5,45.5 42.4,46.4 v1(50.6,46.4)
GPIO3_21: P2.25 SOM1.A26 | length 52.7
  Top Layer w0.2: v1(18.6,25) 19.618,23.982 SOM1.A26@21.039,23.982
  Bottom Layer w0.2: v1(18.6,25) 19.7,26.1 19.7,33.992 21.026,35.319 21.026,38.255 29.372,46.6 36.933,46.6 37.833,47.5 40.456,47.5 41.556,48.6 45.2,48.6 46.4,49.8 46.4,50.6 47.2,51.4 48.86,51.4 P2.25@50.165,52.705
I2C1_SCL: P2.17 SOM1.A51 | length 34.1
  Top Layer w0.2: SOM1.A51@26.039,30.482 31.082,30.482 42.4,41.8 42.4,44.6 38.595,48.405 38.595,51.295 P2.17@40.005,52.705
I2C1_SDA: P2.18 SOM1.A45 | length 33.2
  Top Layer w0.2: SOM1.A45@26.039,28.982 31.582,28.982 43.6,41 43.6,46.565 P2.18@40,50.165
I2C2_SCL: P2.19 SOM1.A33 | length 48.3
  Top Layer w0.2: SOM1.A33@26.039,25.982 27.192,25.982 27.71,26.5 28.29,26.5 28.49,26.3 31.163,26.3 48.825,43.962 48.825,46.625 51.6,49.4 51.6,51 51,51.6 44.4,51.6 43.295,52.705 P2.19@42.545,52.705
I2C2_SDA: P2.20 SOM1.A35 | length 48.4
  Top Layer w0.2: SOM1.A35@26.039,26.482 27.126,26.482 27.544,26.9 28.456,26.9 28.656,26.7 30.997,26.7 48.425,44.128 48.425,46.997 51.175,49.747 51.175,50.775 51.2,50.8 50.8,51.2 47,51.2 46.4,50.6 46.4,49.8 45.6,49 43.71,49 P2.20@42.545,50.165
LCD_DATA0: P1.45 SOM1.B12 | length 20.2
  Top Layer w0.2: SOM1.B12@67.039,20.482 68.07,20.482 72.1,16.452 72.1,7.91 P1.45@75.565,4.445
LCD_DATA1: P1.46 SOM1.B10 | length 22.2
  Top Layer w0.2: SOM1.B10@67.039,19.982 68.004,19.982 71.7,16.286 71.7,7.5 74.4,4.8 74.4,3.07 P1.46@75.565,1.905
LCD_DATA2: P1.43 S1.4 SOM1.B8 | length 32.5
  Top Layer w0.2: SOM1.B8@67.039,19.482 67.938,19.482 71.3,16.12 71.3,12.7 ; v1(70.688,12.7) 71.3,12.7 ; P1.43@73.025,4.445 72.555,4.445 71.3,5.7 71.3,12.7 ; v1(74.955,15.291) 75.987,14.26 78.707,14.26 80.645,16.197 S1.4@80.645,17.51
  Bottom Layer w0.2: v1(70.688,12.7) 73.279,15.291 v1(74.955,15.291)
LCD_DATA3: P1.44 SOM1.B6 | length 24.7
  Top Layer w0.2: SOM1.B6@67.039,18.982 65.982,18.982 65.6,18.6 65.6,14.769 68.7,11.669 68.7,5.118 69,4.818 69,1.6 69.705,0.895 72.015,0.895 P1.44@73.025,1.905
LCD_DATA4: P1.41 SOM1.B2 | length 15.8
  Top Layer w0.2: SOM1.B2@67.039,17.982 66.582,17.982 66.4,17.8 66.4,15.1 69.5,12 69.5,5.45 70.485,4.465 P1.41@70.485,4.445
LCD_DATA5: P1.42 SOM1.B4 | length 19.3
  Top Layer w0.2: SOM1.B4@67.039,18.482 66.282,18.482 66,18.2 66,14.934 69.1,11.834 69.1,5.284 69.4,4.984 69.4,2.99 P1.42@70.485,1.905
LCD_DATA6: P1.39 SOM1.B1 | length 19.8
  Top Layer w0.2: SOM1.B1@72.039,17.982 72.039,17.078 72.5,16.617 72.5,8.5 v1@74.4,6.6
  Bottom Layer w0.2: P1.39@67.945,4.445 69.1,5.6 73.8,5.6 v1(74.6,6.4)
LCD_DATA7: P1.40 SOM1.B3 | length 27.3
  Top Layer w0.2: SOM1.B3@72.039,18.482 72.688,18.482 72.958,18.212 72.958,9.042 75.8,6.2 v1@76.8,6.2
  Bottom Layer w0.2: P1.40@67.945,1.905 69.04,3 76.2,3 77,3.8 v1(77,6)